# Altium PCB PCBV7.2.PcbDoc
Units mil, origin at the board's own origin, x right, y up, seen from the top; angles counter-clockwise.
Board outline 3695 x 2470 mil, 2 copper layers (Top Layer, Bottom Layer); 16 components, 24 nets, 86 pads, 44 vias.
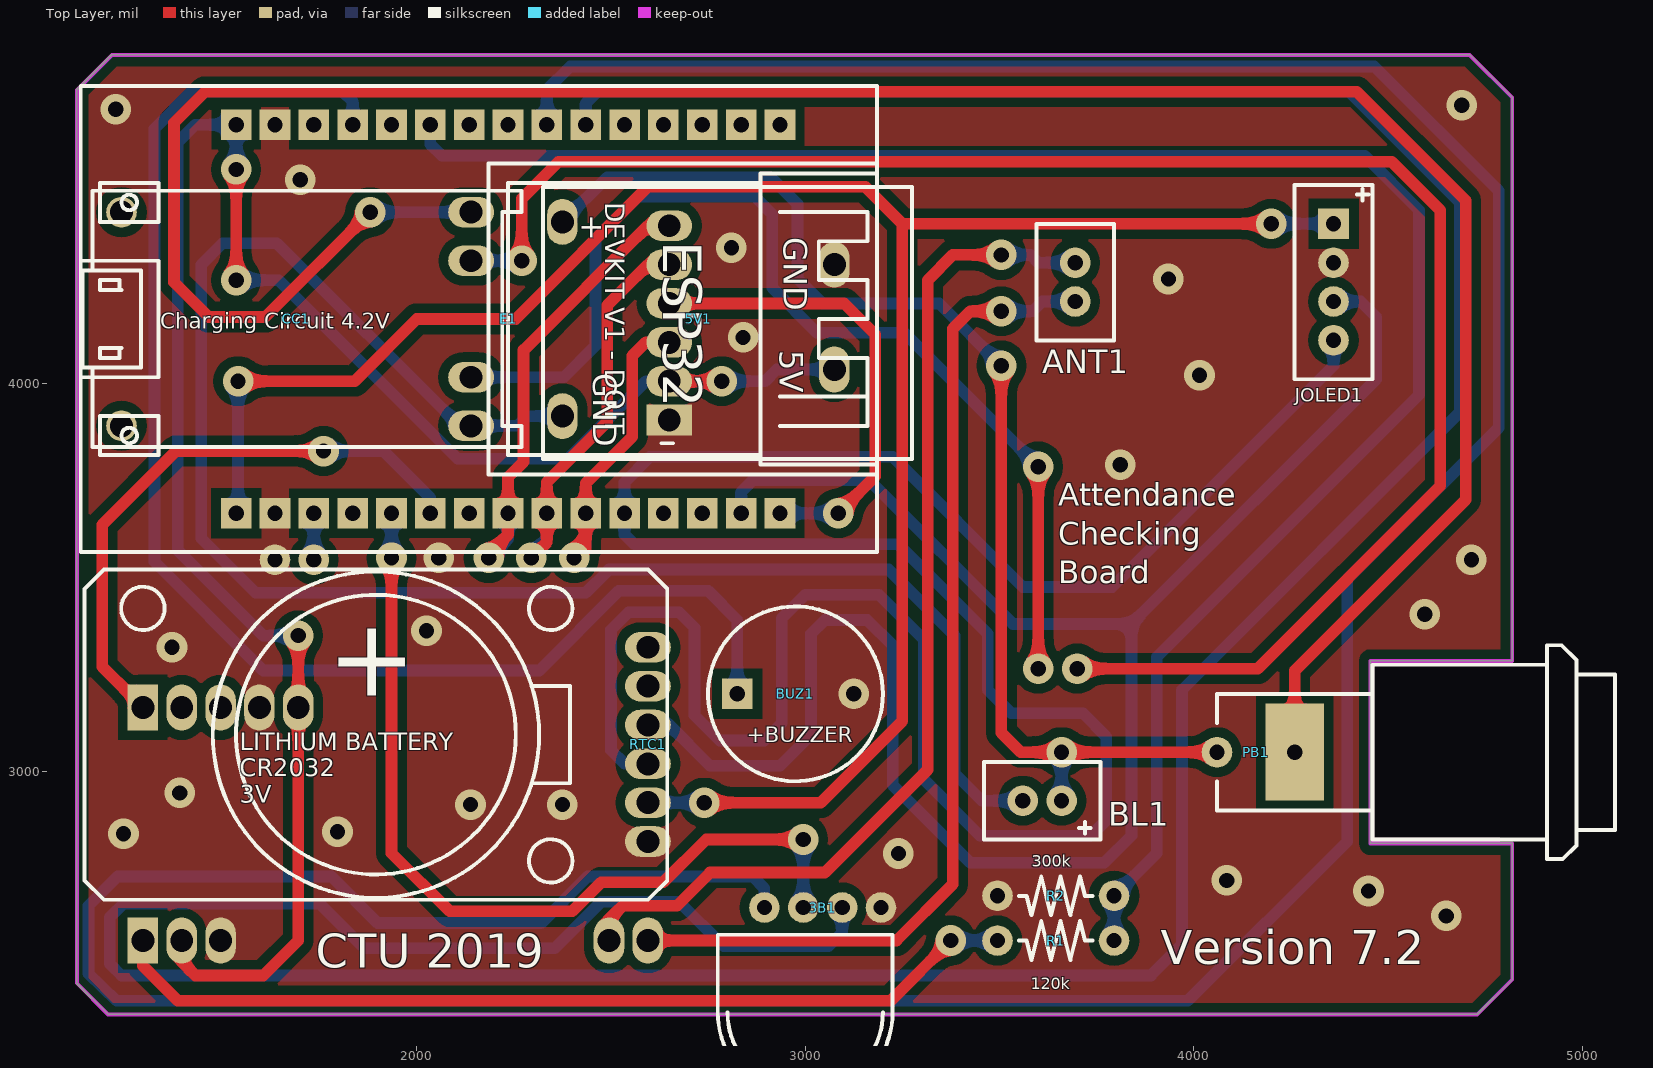
[diagram p0: Top Layer view]
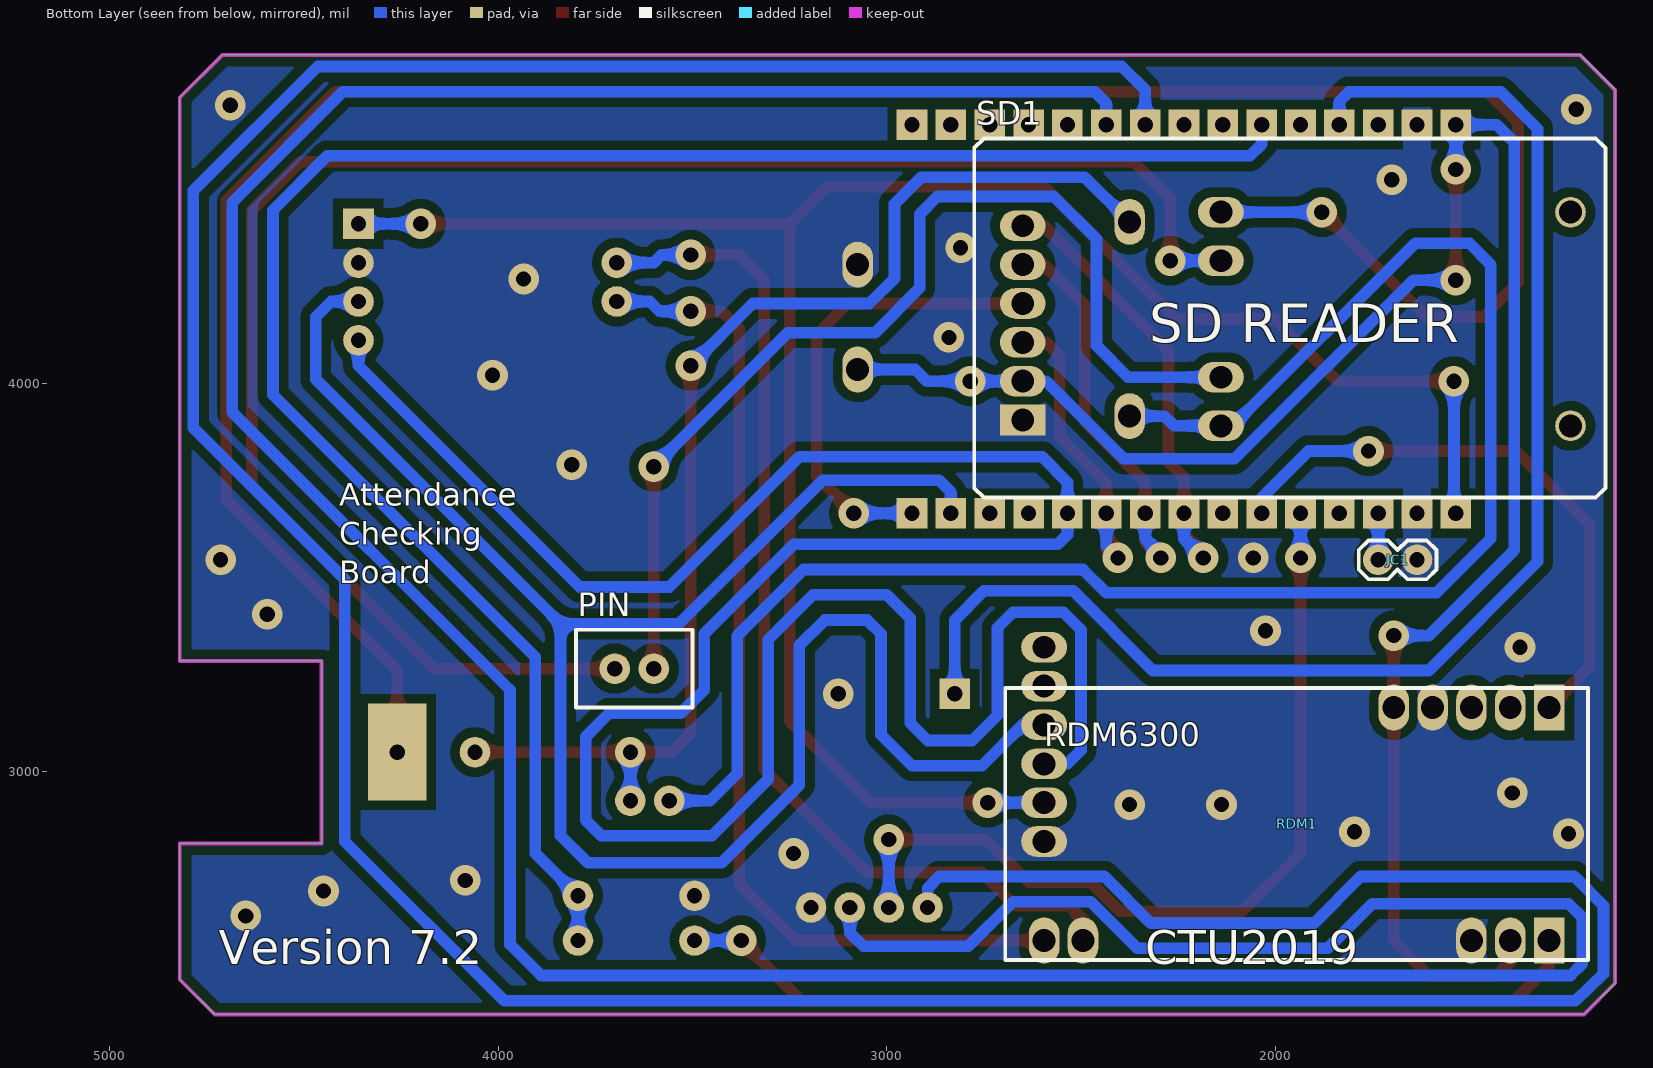
[diagram p1: Bottom Layer view, seen from below]
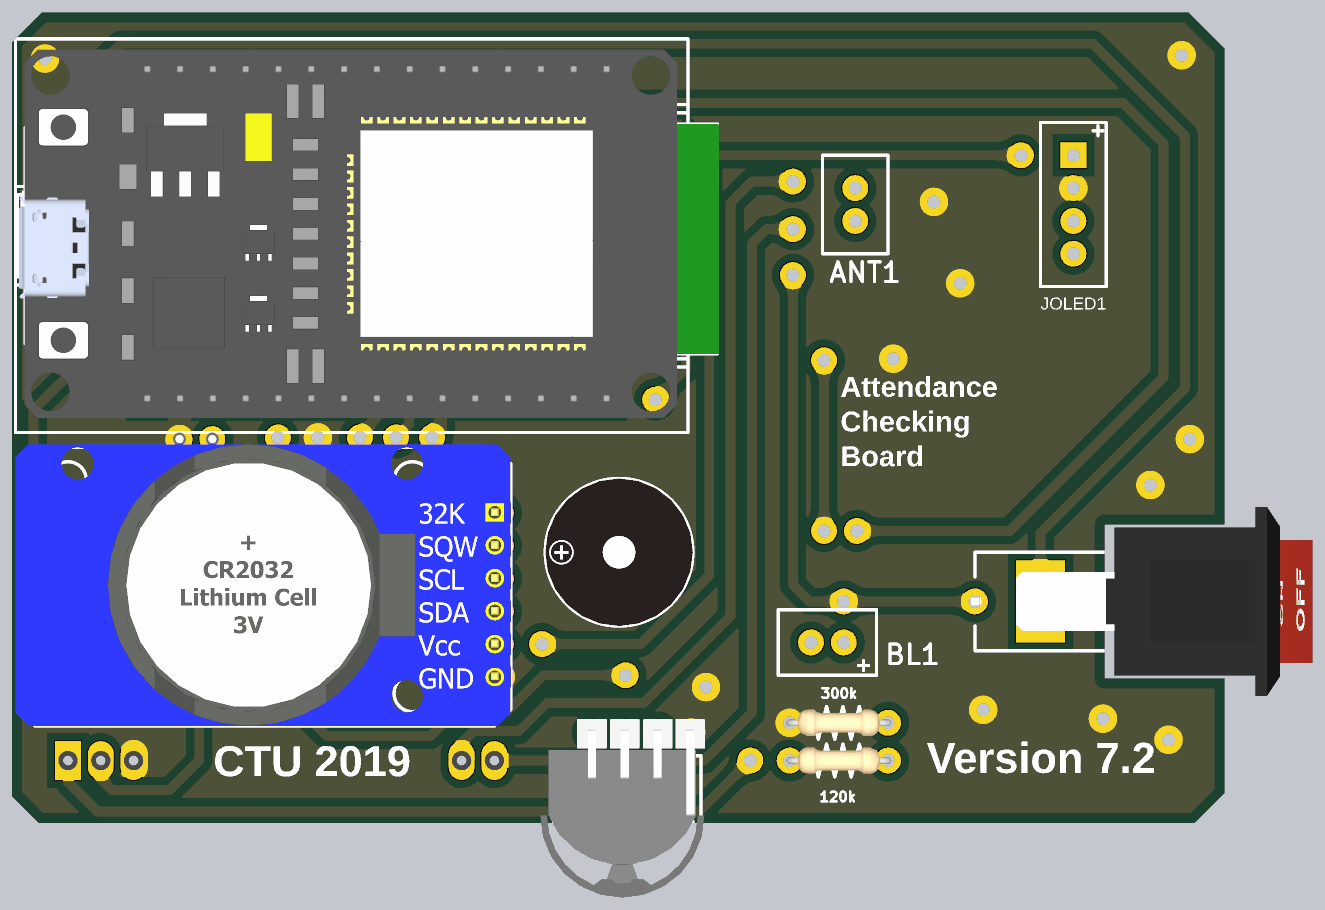
[diagram p2: 3D render of the assembled board from above, using the file's embedded part models]
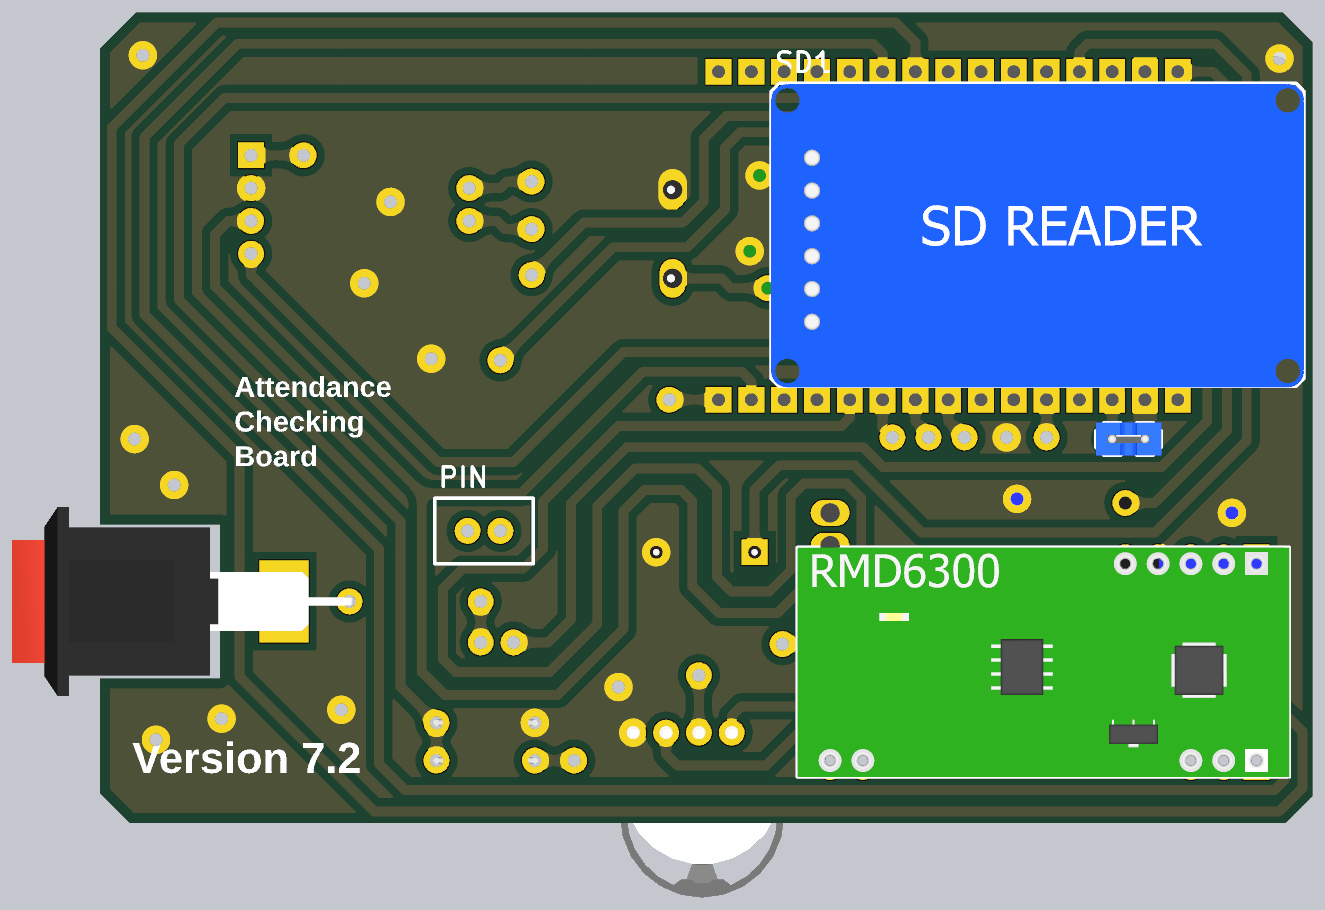
[diagram p3: 3D render of the assembled board from below, using the file's embedded part models]

## Layer stack, top to bottom
Top Solder: solder mask 0.4, Solder Resist, Dk 3.5
Top Layer: signal copper 1.4
Dielectric 1: dielectric 12.6, FR-4, Dk 4.8
Bottom Layer: signal copper 1.4
Bottom Solder: solder mask 0.4, Solder Resist, Dk 3.5

## Board outline
1125,2455 1125,4755 1215,4845 4710,4845 4820,4735 4820,3285 4455,3285 4455,2815 4820,2815 4820,2465 4730,2375 1205,2375

## Design rules (kind name [scope] priority, off if disabled: settings)
Clearance Clearance_5 [InNamedPolygon('BottomPolygon')] p1: gap=25 ignorepadtopadclearanceinfootprint=FALSE
Clearance Clearance_4 [InNamedPolygon('TopPolygon')] p2: gap=25 ignorepadtopadclearanceinfootprint=FALSE
Clearance Clearance_3 [InNamedPolygon('BottomPolygon')] p3: gap=30 ignorepadtopadclearanceinfootprint=FALSE
Clearance Clearance_2 [InNamedPolygon('TopPolygon')] p4: gap=30 ignorepadtopadclearanceinfootprint=FALSE
Clearance Clearance_1 [InNamedPolygon('TopPolygon')] p5: gap=10 ignorepadtopadclearanceinfootprint=FALSE except(0: Arc-Hole Track-Hole SMDPad-Hole THPad-Hole Via-Hole Fill-Hole Poly-Hole Region-Hole Text-Hole)
Clearance TopPolygon [InPolygon] p6: gap=30 ignorepadtopadclearanceinfootprint=FALSE
Clearance [All] p7: gap=10 ignorepadtopadclearanceinfootprint=FALSE
DiffPairsRouting [All] p1: maxlimit=100 minlimit=30 mostfreqgap=30 toplayer_minwidth=15 toplayer_maxwidth=100 toplayer_prefwidth=30 bottomlayer_minwidth=15 bottomlayer_maxwidth=100 bottomlayer_prefwidth=30 maxuncoupledlength=500
PolygonConnect PolygonConnect_6 [All vs IsNamedPolygon('BottomPolygon')] p1: connectstyle=Direct reliefconductorwidth=10 reliefentries=4 polygonreliefangle="90 Angle" airgapwidth=10
PolygonConnect PolygonConnect_5 [All vs IsNamedPolygon('TopPolygon')] p2: connectstyle=Direct reliefconductorwidth=10 reliefentries=4 polygonreliefangle="90 Angle" airgapwidth=10
PolygonConnect PolygonConnect_4 [All vs IsNamedPolygon('BottomPolygon')] p3: thpad.connectstyle=Relief thpad.reliefconductorwidth=30 thpad.reliefentries=4 thpad.polygonreliefangle="90 Angle" thpad.airgapwidth=10 smdpad.connectstyle=Relief smdpad.reliefconductorwidth=10 smdpad.reliefentries=4 smdpad.polygonreliefangle="90 Angle" smdpad.airgapwidth=10 via.connectstyle=Relief via.reliefconductorwidth=30 via.reliefentries=4 via.polygonreliefangle="90 Angle" via.airgapwidth=10
PolygonConnect PolygonConnect_3 [All vs IsNamedPolygon('TopPolygon')] p4: thpad.connectstyle=Relief thpad.reliefconductorwidth=30 thpad.reliefentries=4 thpad.polygonreliefangle="90 Angle" thpad.airgapwidth=10 smdpad.connectstyle=Relief smdpad.reliefconductorwidth=10 smdpad.reliefentries=4 smdpad.polygonreliefangle="90 Angle" smdpad.airgapwidth=10 via.connectstyle=Relief via.reliefconductorwidth=30 via.reliefentries=4 via.polygonreliefangle="90 Angle" via.airgapwidth=10
PolygonConnect PolygonConnect_2 [All vs IsNamedPolygon('TopPolygon')] p5: thpad.connectstyle=Relief thpad.reliefconductorwidth=30 thpad.reliefentries=4 thpad.polygonreliefangle="90 Angle" thpad.airgapwidth=10 smdpad.connectstyle=Relief smdpad.reliefconductorwidth=10 smdpad.reliefentries=4 smdpad.polygonreliefangle="90 Angle" smdpad.airgapwidth=10 via.connectstyle=Relief via.reliefconductorwidth=10 via.reliefentries=4 via.polygonreliefangle="90 Angle" via.airgapwidth=10
PolygonConnect TopPolygon1 [All vs IsNamedPolygon('TopPolygon')] p6: thpad.connectstyle=Direct thpad.reliefconductorwidth=10 thpad.reliefentries=4 thpad.polygonreliefangle="90 Angle" thpad.airgapwidth=10 smdpad.connectstyle=Relief smdpad.reliefconductorwidth=10 smdpad.reliefentries=4 smdpad.polygonreliefangle="90 Angle" smdpad.airgapwidth=10 via.connectstyle=Direct via.reliefconductorwidth=10 via.reliefentries=4 via.polygonreliefangle="90 Angle" via.airgapwidth=10
PolygonConnect PolygonConnect_1 [All vs IsNamedPolygon('TopPolygon')] p7: thpad.connectstyle=Relief thpad.reliefconductorwidth=30 thpad.reliefentries=4 thpad.polygonreliefangle="90 Angle" thpad.airgapwidth=10 smdpad.connectstyle=Relief smdpad.reliefconductorwidth=10 smdpad.reliefentries=4 smdpad.polygonreliefangle="90 Angle" smdpad.airgapwidth=10 via.connectstyle=Relief via.reliefconductorwidth=10 via.reliefentries=4 via.polygonreliefangle="90 Angle" via.airgapwidth=10
PolygonConnect [All] p8: connectstyle=Relief reliefconductorwidth=10 reliefentries=4 polygonreliefangle="90 Angle" airgapwidth=10
RoutingVias [All] p1: holewidth=39.37 width=78.74 viastyle="Through Hole" minholewidth=39.37 minwidth=78.74 maxholewidth=39.37 maxwidth=78.74
SolderMaskExpansion [All] p1: expansion=4
Width [All] p1: maxlimit=100 minlimit=15 preferedwidth=30 minimp=50.000000 maximp=50.000000 favimp=50.000000
29 further rules are at their usual default settings.

## Classes and differential pairs
component class SheetV5: 3B1 5V1 ANT1 BL1 BUZ1 CC1 E1 JC1 JOLED1 PB1 PIN R1 R2 RTC1 SD1

## Components (designator, comment, footprint, x,y, rotation, side; value= is the part's Value field where it differs from the comment)
3B1 "2#3XButton" 2#3XButton 3195,2650 r180 top
5V1 "2#5VOut" 2#5VOut 2375,4415 r270 top
ANT1 "2#RDM6300_Magnetic_Coil" 2#RDM6300_Magnetic_Coil 3795,4410 r180 top
BL1 "2#RDM6300_Magnetic_Coil" 2#RDM6300_Magnetic_Coil 3460,3025 r270 top
BUZ1 "2#BUZZER" 2#BUZZER 2825,3200 r0 top
CC1 "2#TP4056" 2#TP4056 1240,3890 r0 top
E1 "ESP32" 2#1.5mmHole#ESP32 2935,4665 r270 top
JC1 "2#JumpConnector2" 2#JumpConnector2 1635,3545 r0 bottom
JOLED1 "2#J#OLED1.3" 2#Jump4#OLED_1.3 4360,4410 r270 top
PB1 "2#PowerButton" 2#PowerButton 4260,3050 r0 top
PIN "2#RDM6300_Magnetic_Coil" 2#RDM6300_Magnetic_Coil 3800,3365 r270 bottom
R1 "120k" 2#RES 3495,2565 r0 top
R2 "300k" 2#RES 3795,2680 r180 top
RDM1 "2#RDM6300" 2#RDM6300 2595,2565 r180 bottom
RTC1 "2#RTC_DS3231" 2#RTC_DS3231 2595,3320 r0 top
SD1 "2#SD_CARD_MODULE" 2#SD_READER 2650,3905 r180 bottom

## Footprints (in the part's own frame and the unit in brackets; to place one, negate y for a bottom-side part, rotate by r counter-clockwise, add the part's x,y. Pads: shape width x height; smd on the part's side, far side on the other; paste and mask are expansions set on the pad)
2#1.5mmHole#ESP32 [mm] "ESP32 DEVKIT V1"
  rect 2x2 hole 1: 1(0,0) 2(0,-2.54) 3(0,-5.08) 4(0,-7.62) 5(0,-10.16) 6(0,-12.7) 7(0,-15.24) 8(0,-17.78) 9(0,-20.32) 10(0,-22.86) 11(0,-25.4) 12(0,-27.94) 13(0,-30.48) 14(0,-33.02) 15(0,-35.56) 16(25.4,-35.56) 17(25.4,-33.02) 18(25.4,-30.48) 19(25.4,-27.94) 20(25.4,-25.4) 21(25.4,-22.86) 22(25.4,-20.32) 23(25.4,-17.78) 24(25.4,-15.24) 25(25.4,-12.7) 26(25.4,-10.16) 27(25.4,-7.62) 28(25.4,-5.08) 29(25.4,-2.54) 30(25.4,0)
  silkscreen extent -2.54,-45.72 27.94,6.35, body extent -1.7,-45.45 26.8,5.48, height 10.72
2#3XButton [mm]
  round 2 hole 1: 1(0,0) 2(2.54,0) 3(5.08,0) 4(7.62,0)
  silkscreen extent -0.76,1.78 10.67,12.57, body extent -1.08,-1.07 11.68,12.76, height 3.81
2#5VOut [mm]
  oval 3x2 hole 1.5: 1(0,0) 2(12.7,0) 3(2.794,17.78) 4(9.652,17.78)
  silkscreen extent -2.29,-1.27 15.49,22.86, body extent -2.29,-1.14 15.49,22.99, height 5.08
2#BUZZER [mm] "BUZZER"
  rect 2x2 hole 1: 1(0,0)
  round 2 hole 1: 2(7.62,0)
  silkscreen extent -1.9,-5.71 9.53,5.71, body extent -1.9,-5.71 9.52,5.72, height 9.4
2#Jump4#OLED_1.3 [mm] "OLED_1.3"
  rect 2x2 hole 1: 1(0,0)
  round 2 hole 1: 2(2.54,0) 3(5.08,0) 4(7.62,0)
  silkscreen extent -2.54,-2.54 10.16,2.54
2#JumpConnector2 [mm] "JumpConnector2"
  round 2 hole 1: 1(0,0) 2(2.54,0)
  silkscreen extent -1.27,-1.27 3.81,1.27, body extent -1.27,-1.27 3.81,1.27, height 10.21
2#PowerButton [mm]
  round 2 hole 1: 1(-5.08,0)
  rect 3.81x6.35 hole 1: 2(0,0)
  silkscreen extent -5.08,-6.98 20.95,6.98, body extent -5.4,-7.3 21.05,7.3, height 10.5
2#RDM6300 [mm] "RDM6300"
  oval 2x3 hole 1.5: 1(0,0) 2(2.54,0) 3(27.94,0) 4(30.48,0) 7(30.48,15.24) 8(27.94,15.24) 9(25.4,15.24) 10(22.86,15.24)
  rect 2x3 hole 1.5: 5(33.02,0) 6(33.02,15.24)
  silkscreen extent -2.54,-1.27 35.56,16.51, body extent -2.54,-1.27 35.56,16.51, height 5.08
2#RDM6300_Magnetic_Coil [mm] "RDM6300_Magnetic_Coil"
  round 2 hole 1: 1(2.54,5.08) 2(2.54,2.54)
  silkscreen extent 0,0 5.08,7.62
2#RES [mm]
  round 2 hole 1: 1(0,0) 2(7.62,0)
  silkscreen extent 1.4,-1.27 6.22,1.27, body extent -0.25,-1.91 7.87,1.02, height 2.29
2#RTC_DS3231 [mm] "RTC_DS3231"
  oval 3x2 hole 1.5: 1(0,0) 2(0,-2.54) 3(0,-5.08) 4(0,-7.62) 5(0,-10.16) 6(0,-12.7)
  silkscreen extent -36.83,-16.51 1.27,5.08, body extent -37.07,-16.49 3.05,10.67, height 11.66
2#SD_READER [mm] "SD_READER"
  rect 3x2 hole 1.5: 1(0,0)
  oval 3x2 hole 1.5: 2(0,2.54) 3(0,5.08) 4(0,7.62) 5(0,10.16) 6(0,12.7)
  silkscreen extent -3.18,-5.08 38.1,18.41, body extent -3.18,-5.14 38.1,18.35, height 5.08
2#TP4056 [mm]
  round 2 hole 1.5: 1(0,13.97) 2(0,0)
  oval 3x2 hole 1.5: 3(22.86,13.97) 4(22.86,0) 5(22.86,10.795) 6(22.86,3.175)
  silkscreen extent -2.54,-1.4 26.16,15.37, body extent -2.29,-1.27 26.04,15.24, height 4.95

## Part data
E1: library part 2#B#ESP32_DOIT_DEVKIT_V1
R1 R2: library part 2#RES

## Via types
v1: diameter 78.74, hole 39.37, Top Layer to Bottom Layer, 44 vias

## Nets (pads, with @x,y where several pads share a name; then routed paths per layer and width w, separated by ;. In a path a pad name is that pad's centre, name@x,y a point inside that pad or via, vN(x,y) a via of type N, cw(c..) or ccw(c..) an arc to the next point about the centre after c; other vN are vias at no path point)
3.3V: E1.16 JOLED1.1 RTC1.5 | length 5420.5
  Top Layer w30: v1(1540,4005) 1840,4005 2000,4165 2255,4165 2595,4505 3155,4505 3250,4410 3250,3130 3040,2920 v1(2740,2920) ; 3260,4410 v1(4200,4410)
  Bottom Layer w30: E1.16 1540,3670 v1(1540,4005) ; RTC1.5 v1(2740,2920) ; v1(4200,4410) JOLED1.1
4.2VSS: 5V1.1 BL1.1 PB1.1 | length 3136.5
  Top Layer w30: v1(3505,4045) 3505,3100 3555,3050 v1(3660,3050) PB1.1
  Bottom Layer w30: 5V1.1 2490,4530 2911.64,4530 2980,4461.64 2980,4270 3045,4205 3345,4205 v1(3505,4045) ; BL1.1 v1(3660,3050)
4.2VSS2: CC1.3 PB1.2 | length 6400.5
  Top Layer w30: v1(1880,4440) 1610,4170 1465,4170 1375,4260 1375,4670 1455,4750 4420,4750 4700,4470 4700,3700 4260,3260 PB1.2
  Bottom Layer w30: v1(1880,4440) CC1.3
5V: 5V1.4 E1.15 RDM1.4 RDM1.10 SD1.2 | length 5194.8
  Top Layer w30: RDM1.4 1395,2510 1430,2475 1605,2475 1695,2565 RDM1.10 1690,3170 1700,3180 1695,3185 v1(1695,3350) ; v1(1535,4265) v1(1535,4550) ; E1.15@1535,4655 1530,4660 E1.15 ; SD1.2 v1(2785,4005)
  Bottom Layer w30: v1(1535,4265) 1645,4265 2105,3805 2390,3805 2590,4005 SD1.2 v1(2785,4005) 2896.64,4005 2926.64,4035 5V1.4 ; v1(1535,4550) E1.15 1430,4665 1385,4620 1385,3570 1605,3350 v1(1695,3350)
ANT1: ANT1.1 RDM1.1 | length 2619.1
  Top Layer w30: RDM1.1 3235,2565 3380,2710 3380,4140 3425,4185 v1(3505,4185)
  Bottom Layer w30: v1(3505,4185) 3585,4185 3610,4210 ANT1.1
ANT2: ANT1.2 RDM1.2 | length 2709.7
  Top Layer w30: RDM1.2 2495,2620 2530,2655 2670,2655 2755,2740 3050,2740 3315,3005 3315,4265 3380,4330 v1(3505,4330)
  Bottom Layer w30: v1(3505,4330) 3580,4330 3600,4310 ANT1.2
BUZZER: BUZ1.1 E1.12 | length 3656.7
  Bottom Layer w30: E1.12 1835,4725 1810,4750 1420,4750 1325,4655 1325,3540 1605,3260 2315,3260 2520,3465 2750,3465 2825,3390 BUZ1.1
GND: 3B1.1 5V1.3 BUZ1.2 E1.14 E1.17 JC1.1 JOLED1.2 R2.2 RDM1.3 RDM1.9 RTC1.6 SD1.1
  other v1: 4650,2628.33 4450,2692.62 4085,2719.71 3240,2789.06 1245,2840 1795.94,2845 2138.38,2915 2375,2915 1390,2945 1370,3320 2025,3362.62 4594.65,3405 4715,3545 2056.88,3550 3810.93,3790 4015,4020 2840,4117.61 3935,4267.96 2810,4348.73 1700,4523.32 1225,4705 4690,4715
GNDSS: 5V1.2 BL1.2 CC1.4 | length 4515.1
  Bottom Layer w30: 5V1.2 2285,3915 2260,3890 CC1.4 2110,3890 1640,4360 1500,4360 1445,4305 1445,3600 1585,3460 2435,3460 2495,3520 3215,3520 3385,3350 3385,2995 3455,2925 BL1.2
I2C_SCL: E1.29 JOLED1.3 RTC1.3 | length 5043.1
  Bottom Layer w30: RTC1.3 2650,3120 2755,3015 2935,3015 3015,3095 3015,3355 3050,3390 3160,3390 3225,3325 3225,2965 3425,2765 3770,2765 3840,2835 3840,3380 ; E1.29 2835,3720 2865,3750 3165,3750 3535,3380 3840,3380 ; JOLED1.3 4430,4210 4470,4170 4470,4010 3840,3380
I2C_SDA: E1.26 JOLED1.4 RTC1.4 | length 6961.5
  Bottom Layer w30: RTC1.4 2535,3020 2500,3055 2500,3365 2545,3410 2675,3410 2715,3370 2715,3145 2780,3080 2895,3080 2940,3125 2940,3395 3000,3455 3190,3455 3305,3340 3305,2980 3450,2835 3735,2835 3775,2875 3775,3090 3715,3150 3530,3150 3470,3210 3470,3355 3240,3585 2560,3585 2535,3610 E1.26 2535,3745 2600,3810 3225,3810 3560,3475 3790,3475 4360,4045 JOLED1.4
NetCC1_5: CC1.5 PIN.2 | length 4589.9
  Top Layer w30: v1(2270,4315) 2270,4475 2365,4570 4510,4570 4635,4445 4635,3735 4165,3265 PIN.2
  Bottom Layer w30: CC1.5 2145,4320 2150,4315 v1(2270,4315)
NetCC1_6: CC1.6 PIN.1 | length 2732.6
  Top Layer w30: PIN.1 v1(3600,3785)
  Bottom Layer w30: CC1.6 2379,4015 2460,4096 2460,4370 2570.35,4480.35 2869.65,4480.35 2915,4435 2915,4245 3030,4130 3255,4130 v1(3600,3785)
RE_CLK: 3B1.4 E1.7 | length 10080
  Bottom Layer w30: E1.7 2335,4755 2395,4815 4465,4815 4785,4495 4785,3885 4395,3495 4395,2820 3985,2410 1227.34,2410 1155,2480 1155,2655 1230,2730 1780,2730 1900,2610 2320,2610 2440,2730 2865,2730 2895,2700 3B1.4
RE_DT: 3B1.2 E1.6 | length 9691.2
  Bottom Layer w30: E1.6 2435,4720 2465,4750 4400,4750 4685,4465 4685,3925 3970,3210 3970,2555 3890,2475 1240,2475 1210,2505 1210,2625 1245,2660 1750,2660 1865,2545 2355,2545 2475,2665 2675,2665 2790,2550 3060,2550 3095,2585 3B1.2
RE_SW: 3B1.3 E1.20 | length 2248.8
  Top Layer w30: v1(1935,3550) 1935,2790 2085,2640 2400,2640 2475,2715 2635,2715 2745,2825 v1(2995,2825)
  Bottom Layer w30: v1(1935,3550) E1.20 ; 3B1.3 v1(2995,2825)
RF_DATA: E1.21 RDM1.6 | length 1526.9
  Top Layer w30: RDM1.6 1190,3270 1190,3635 1380,3825 v1(1760,3825)
  Bottom Layer w30: v1(1760,3825) 1915,3825 2035,3705 E1.21
RF_INT: R1.1 RDM1.5 | length 2366.5
  Top Layer w30: RDM1.5 1295,2500 1385,2410 3220,2410 v1(3375,2565)
  Bottom Layer w30: v1(3375,2565) R1.1
RF_INT_3.3: E1.10 R1.2 R2.1 | length 4870.6
  Bottom Layer w30: E1.10 2035,4615 2065,4585 4440,4585 4580,4445 4580,3970 3905,3295 3905,2790 R2.1 R1.2
SPI_CLK: E1.24 SD1.5 | length 1065.8
  Top Layer w30: v1(2295,3550) 2335,3590 E1.24 2335,3745 2490,3900 2490,4200 2595,4305 SD1.5
  Bottom Layer w30: v1(2295,3550) 2295,3560 2335,3600 E1.24
SPI_CS: E1.23 SD1.6 | length 1215.5
  Top Layer w30: v1(2185,3550) 2185,3560 2235,3610 E1.23 2235,3757.5 2275,3797.5 2275,4085 2595,4405 SD1.6
  Bottom Layer w30: v1(2185,3550) 2235,3600 E1.23
SPI_MISO: E1.25 SD1.3 | length 824.9
  Top Layer w30: v1(2405,3550) 2415,3550 2435,3570 E1.25 2435,3742 2555,3862 2555,4070 2590,4105 SD1.3
  Bottom Layer w30: v1(2405,3550) 2435,3580 E1.25
SPI_MOSI: E1.30 SD1.4 | length 1212.5
  Top Layer w30: SD1.4 3100,4205 3180,4125 3180,3760 v1(3085,3665)
  Bottom Layer w30: E1.30 v1(3085,3665)
TOGND: E1.18 JC1.2 | length 120
  Bottom Layer w30: JC1.2 E1.18
pads on no net: CC1.1 CC1.2 E1.1 E1.2 E1.3 E1.4 E1.5 E1.8 E1.9 E1.11 E1.13 E1.19 E1.22 E1.27 E1.28 RDM1.7 RDM1.8 RTC1.1 RTC1.2

## Polygon pours and split planes (outlines as drawn)
GND on Bottom Layer "BottomPolygon" (solid, pour order 6): 1125,4755 1215,4845 4710,4845 4820,4735 4820,3285 4455,3285 4455,2815 4820,2815 4820,2465 4730,2375 1205,2375 1125,2455
GND on Top Layer "TopPolygon" (solid, pour order 18): 1125,4755 1215,4845 4710,4845 4820,4735 4820,3285 4455,3285 4455,2815 4820,2815 4820,2465 4730,2375 1205,2375 1125,2455

## Keep-outs
Top Layer:
  lines w10: 4460,3275 4460,2825 4785,2825
Keep-Out Layer:
  the board outline again, w10

## Silkscreen, mask and mechanical layers (free items; w line width, h text height)
Top Overlay:
  lines w10: 2630,3845 2660,3845 ; 3705,2855 3735,2855 ; 3720,2840 3720,2870 ; 4420,4485 4450,4485 ; 4435,4470 4435,4500
  text "Attendance / Checking / Board" at 3651.74,3465 h100
  text "Version 7.2" at 3915,2475 h150
  text "CTU 2019" at 1740,2465 h150
Bottom Overlay:
  text "Attendance / Checking / Board" at 4409.29,3465 h100
  text "CTU2019" at 2335,2475 h150
  text "Version 7.2" at 4720,2475 h150

## Text inside footprints (layer, text, board x,y; h text height)
5V1: Top Overlay "+" at 2425,4435 h60 r270; Top Overlay "GND" at 2455,4025 h60 r270; Top Overlay "GND" at 2945,4375 h60 r270; Top Overlay "5V" at 2935,4085 h60 r270
BUZ1: Top Overlay "+BUZZER" at 2850,3075 h40
CC1: Top Overlay "Charging Circuit 4.2V" at 1340,4140 h40
E1: Top Overlay "DEVKIT V1 - DOIT" at 2485,4465 h50 r270
RDM1: Bottom Overlay "RDM6300" at 2595,3065 h60
RTC1: Top Overlay "+" at 1770,3195 h200; Top Overlay "LITHIUM BATTERY / CR2032 / 3V" at 1545,2920 h45
SD1: Bottom Overlay "SD READER" at 2325,4105 h100